# EAGLE board test02 (EAGLE 9.2.2)
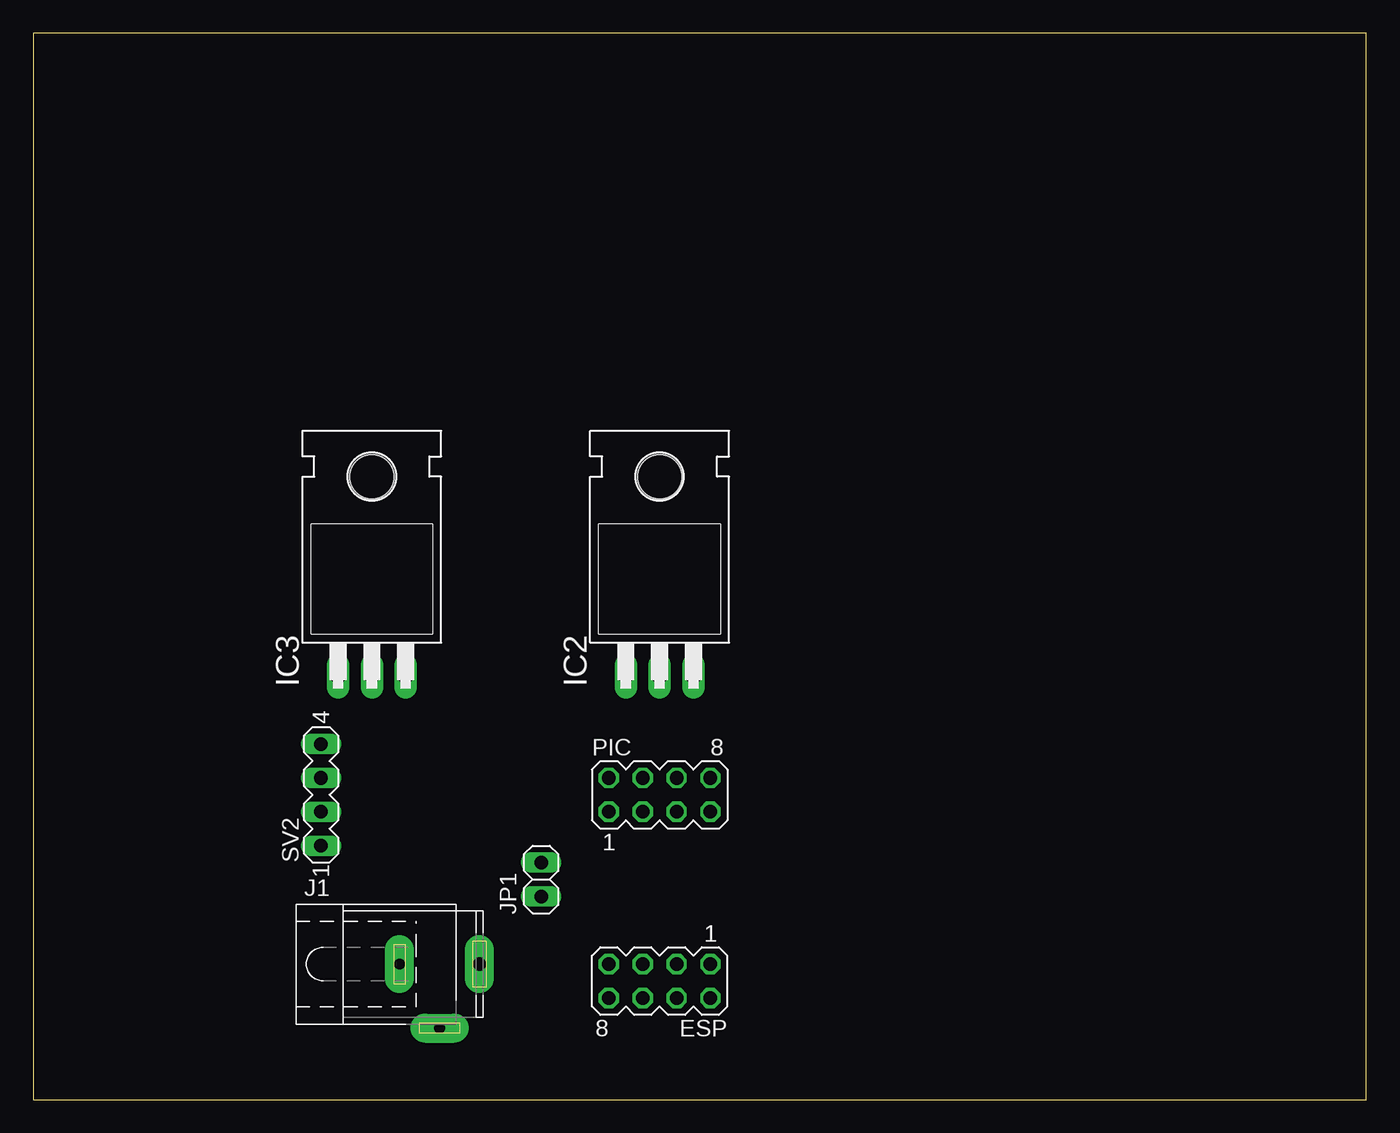
[diagram p0: board, top side]
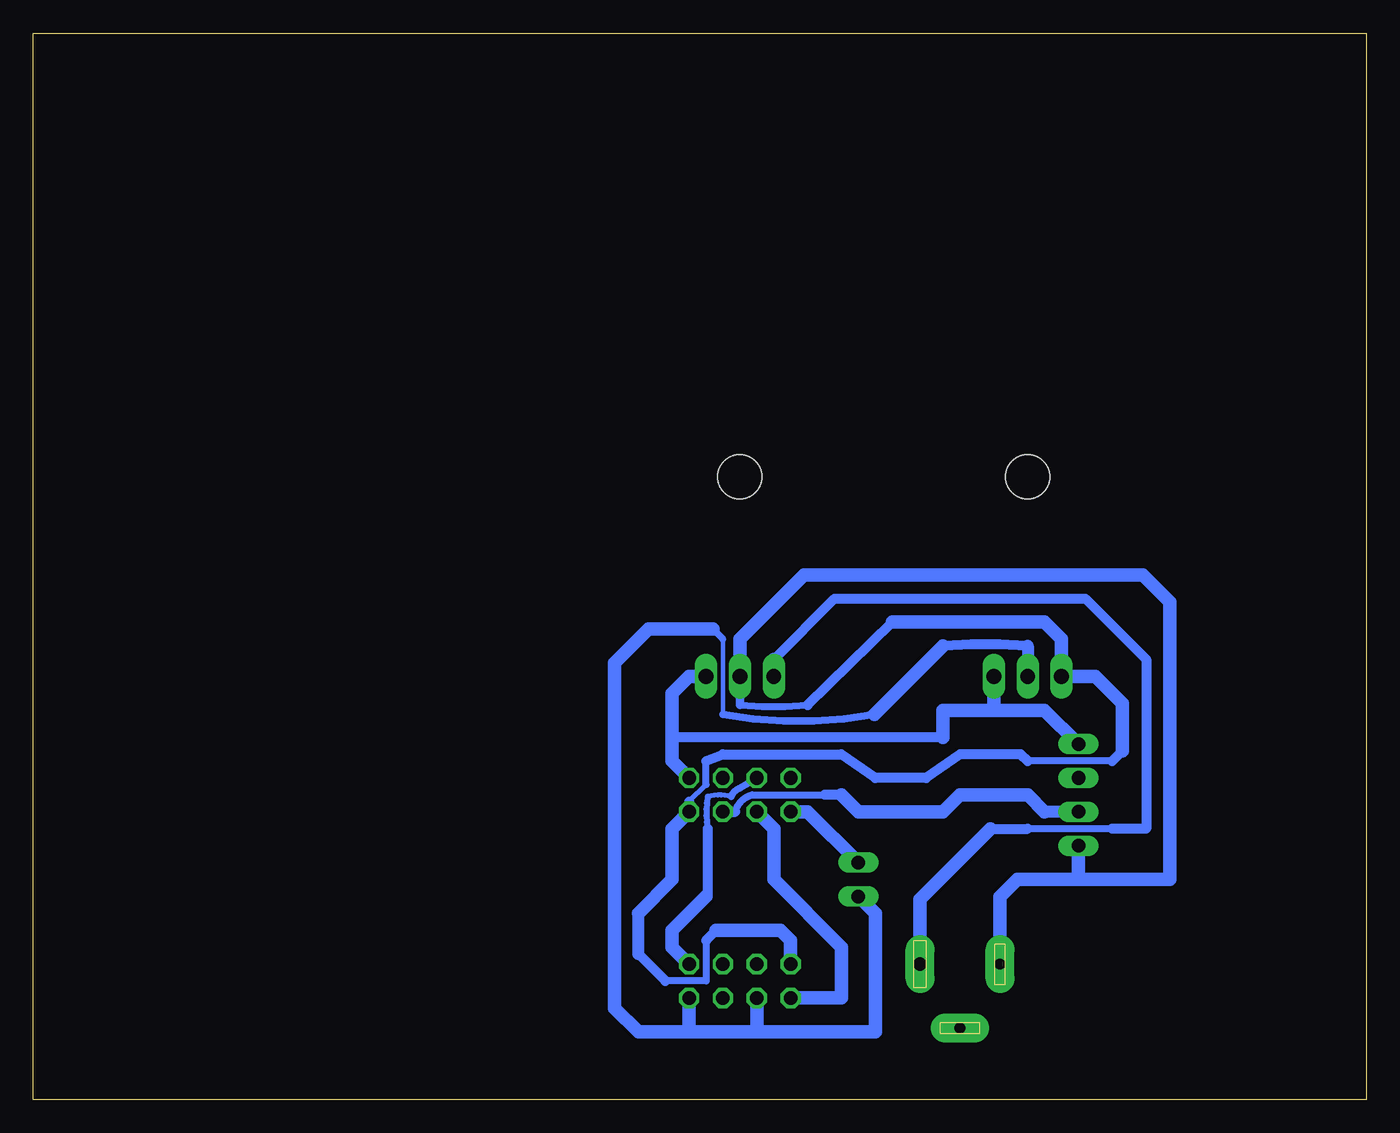
[diagram p1: board, bottom side, seen from below]

Size 100 x 80 mm. Coordinates in mm from the lower left corner, seen from the top.
Outline: 0,0 100,0 100,80 0,80 0,0
Copper layers (1*16): Top 0.035mm / dielectric 1.5mm / Bottom 0.035mm
Design rules "default": minimum track width 6mil, minimum drill 0.35mm, track to track 6mil, track to pad 6mil, pad to pad 6mil, via to via 6mil, smd to smd 6mil, copper to edge 40mil, drill to drill 6mil, minimum pad ring 10mil, minimum via ring 8mil, stop-mask expansion 4mil, vias tented up to drill 0mil, thermal gap 10mil
Net classes: 0 default: width 0.254 mm, clearance 0.254 mm

## Footprints (pad centres in the part's own frame; a part is rotated, then mirrored left to right if it is on the bottom)
MA04-2 = drill 1.016 octagon: 1 -3.81,-1.27; 2 -3.81,1.27; 3 -1.27,-1.27; 4 -1.27,1.27; 5 1.27,-1.27; 6 1.27,1.27; 7 3.81,-1.27; 8 3.81,1.27
TO220H = drill 1.118 long: 1 -2.54,-10.16; 2 0,-10.16; 3 2.54,-10.16 | hole 3.302: 0,4.826
SPC4078 = drill 0.8 pad 2.184 long: 1 -3,0; 2 0,-4.8 | drill 1 pad 2.184 long: 3 3,0
1X02 = drill 1.016 long: 1 -1.27,0; 2 1.27,0
MA04-1 = drill 1.016 long: 1 -3.81,0; 2 -1.27,0; 3 1.27,0; 4 3.81,0

## Placement (x,y rotation side)
ESP  [MA04-2]  46.99,8.89 180 top
IC2  7805T  [TO220H]  46.99,41.91 0 top
IC3  LM1117T(H)-2.5  [TO220H]  25.4,41.91 0 top
J1  [SPC4078]  30.48,10.16 0 top
JP1  [1X02]  38.1,16.51 90 top
PIC  [MA04-2]  46.99,22.86 0 top
SV2  [MA04-1]  21.59,22.86 90 top

## Library data of the parts
ESP PIC SV2 = con-lstb; OC_FARNELL: unknown; OC_NEWARK: unknown
IC2 = linear
IC3 = lm1117_10; MF: Texas Instruments; MPN: LM1117T-2.5; OC_FARNELL: 1798354; OC_NEWARK: 75R2090
J1 = con-jack; OC_FARNELL: unknown; OC_NEWARK: unknown
JP1 = pinhead

## Nets
GND: ESP.7 IC2.2 IC3.1 J1.1 PIC.7 SV2.1
N$1: IC2.1 J1.3
N$2: ESP.1 PIC.4
N$4: ESP.2 ESP.6 IC3.2 JP1.1
N$5: ESP.8 PIC.3
N$7: JP1.2 PIC.1
N$8: PIC.5 SV2.2
N$9: IC2.3 IC3.3 PIC.8 SV2.4

## Tracks (layer width: path | path; a pad name or v marks a point on that pad's centre or on a via)
GND
  Bottom 0.381: 49.53,23.62 50.8,22.35
  Bottom 0.508: 49.53,11.94 49.53,8.89 52.58,8.89 | 49.53,23.62 49.53,25.4 | 19.05,25.4 25.4,25.4 | 46.99,29.59 arc-10 41.91,29.59
  Bottom 0.635: 46.99,29.59 IC2.2
  Bottom 0.762: 49.53,11.94 48.77,12.7 | 50.8,22.35 PIC.7 | 25.4,25.4 25.91,25.91 30.48,25.91 33.02,24.13 36.83,24.13 39.37,25.91 48.26,25.91 49.53,25.4 | 18.29,26.16 19.05,25.4 | 52.58,8.89 54.61,10.92 | 41.91,29.59 35.56,35.81
  Bottom 0.889: 54.61,10.92 54.61,13.97
  Bottom 1.016: ESP.7 43.18,11.94 43.94,12.7 48.77,12.7 | 54.61,13.97 52.07,16.51 52.07,20.32 PIC.7 | J1.1 27.48,15.19 26.16,16.51 21.59,16.51 | 35.56,35.81 24.13,35.81 22.86,34.54 IC3.1 20.32,31.75 18.29,29.72 18.29,26.16 | 21.59,16.51 SV2.1 | IC2.2 46.99,34.54 42.16,39.37 16.76,39.37 14.73,37.34 14.73,16.51 21.59,16.51
N$1
  Bottom 0.508: 19.05,20.32 25.4,20.32
  Bottom 0.762: 44.45,33.02 39.88,37.59 22.86,37.59 21.08,37.59 16.51,33.02 16.51,20.32 19.05,20.32 | 28.19,20.32 25.4,20.32
  Bottom 1.016: 44.45,33.02 IC2.1 | J1.3 33.48,15.03 28.19,20.32
N$2
  Bottom 0.254: 49.4,15.37 49.53,15.24
  Bottom 0.381: 47.62,22.73 arc-30 49.4,22.73
  Bottom 0.457: 49.4,22.73 arc-20 49.4,20.32
  Bottom 0.508: 47.62,22.73 arc50 46.99,23.37 PIC.4
  Bottom 0.762: 49.4,20.32 49.4,15.37
  Bottom 1.016: ESP.1 52.07,11.43 52.07,12.7 49.53,15.24
N$4
  Bottom 0.356: 48.26,34.54 48.26,29.21 48.26,28.88
  Bottom 0.508: 49.02,35.31 48.26,34.54
  Bottom 0.559: 48.26,28.88 arc-20 36.91,28.88
  Bottom 0.762: 25.4,34.04 arc-10 31.75,34.04
  Bottom 0.889: 25.4,34.04 IC3.2
  Bottom 1.016: 49.02,35.31 53.85,35.31 56.39,32.77 56.39,6.86 54.61,5.08 50.8,5.08 | 45.72,5.08 36.83,5.08 36.83,13.97 JP1.1 | 45.72,5.08 ESP.6 | ESP.2 50.8,5.08 | 45.72,5.08 50.8,5.08 | 31.75,34.04 36.91,28.88
N$5
  Bottom 1.016: PIC.3 44.45,20.32 44.45,16.51 39.37,11.43 39.37,7.62 ESP.8
N$7
  Bottom 1.016: PIC.1 41.91,21.59 JP1.2
N$8
  Bottom 0.508: 47.34,21.59 arc60 46.07,22.86 40.64,22.86
  Bottom 0.762: 39.37,22.86 40.64,22.86 | PIC.5 47.34,21.59
  Bottom 0.889: SV2.2 24.13,21.59
  Bottom 1.016: 24.13,21.59 25.4,22.86 30.48,22.86 31.75,21.59 38.1,21.59 39.37,22.86
N$9
  Bottom 0.762: 31.75,27.18 52.07,27.18
  Bottom 1.016: PIC.8 52.07,25.4 52.07,27.18 52.07,30.48 50.8,31.75 IC2.3 | IC3.3 27.94,29.21 | 27.94,29.21 31.75,29.21 31.75,27.18 | 27.94,29.21 24.13,29.21 SV2.4